# Altium PCB Gate_Driver_SMPS_V2.0_PCB3.PcbDoc
Units mm, origin at the board's own origin, x right, y up, seen from the top; angles counter-clockwise.
Board outline 47 x 30 mm, 2 copper layers (Top Layer, Bottom Layer); 42 components, 33 nets, 126 pads, 43 vias.
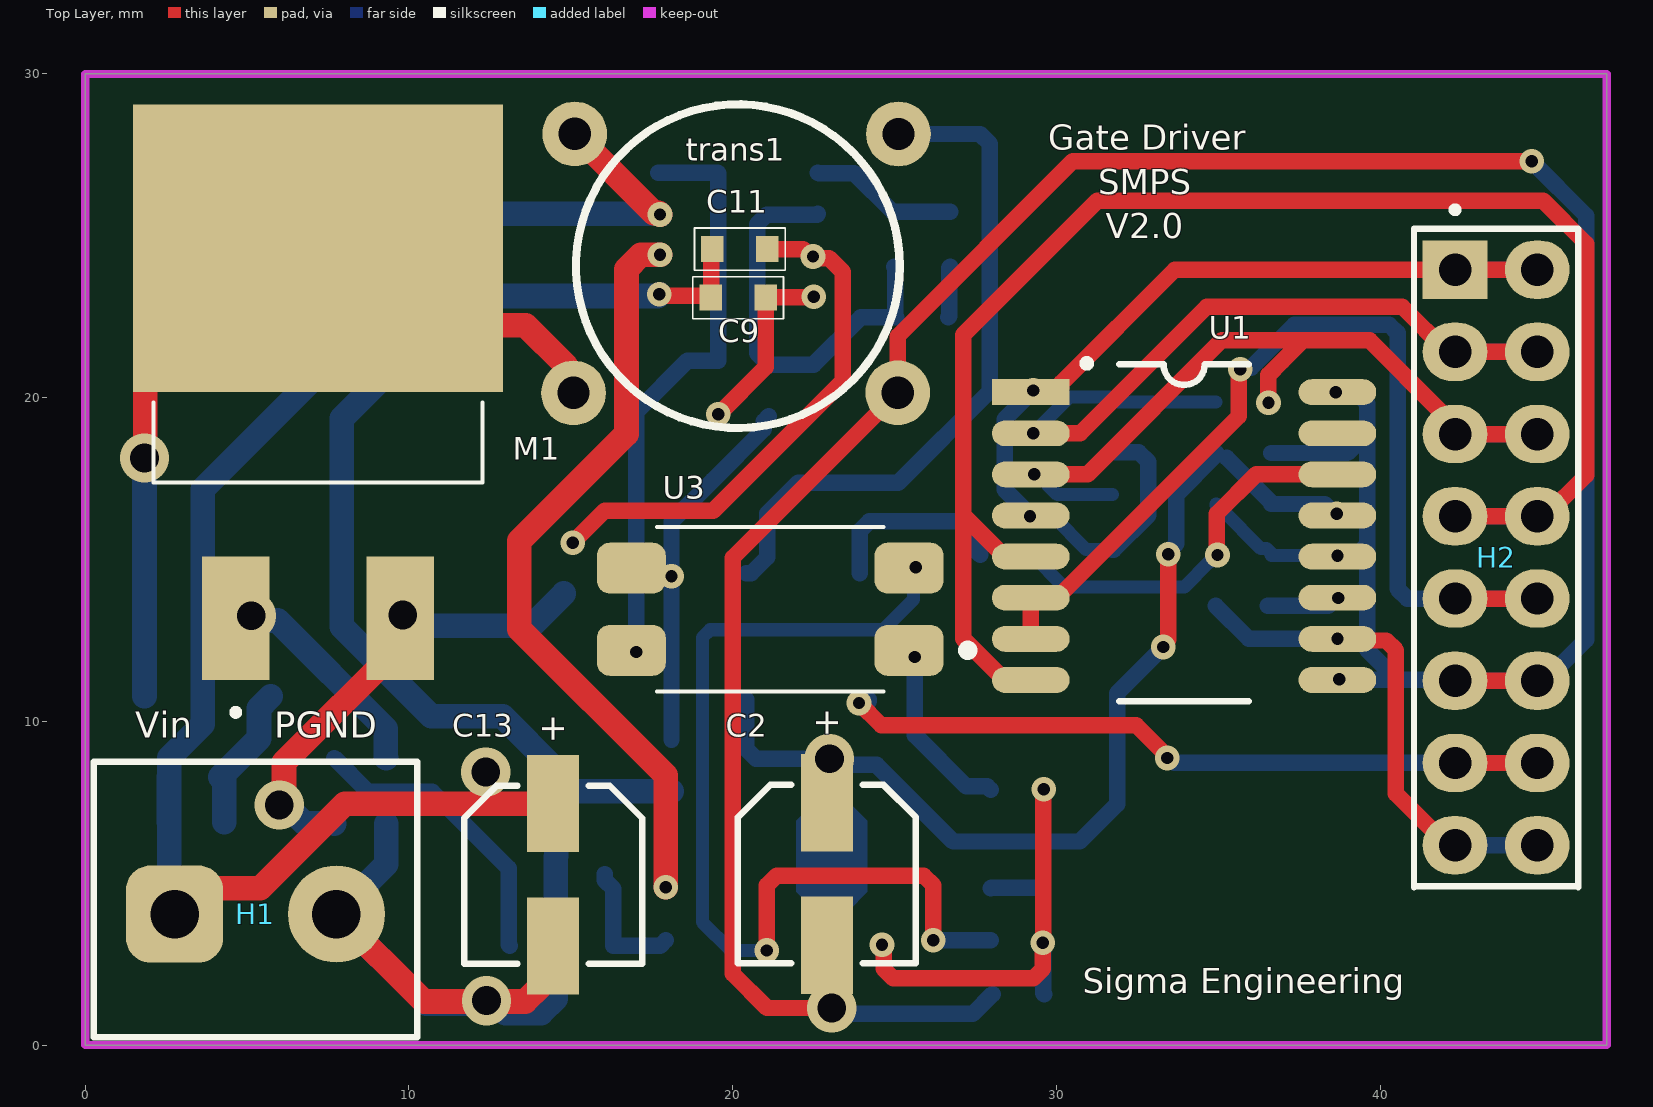
[diagram p0: Top Layer view]
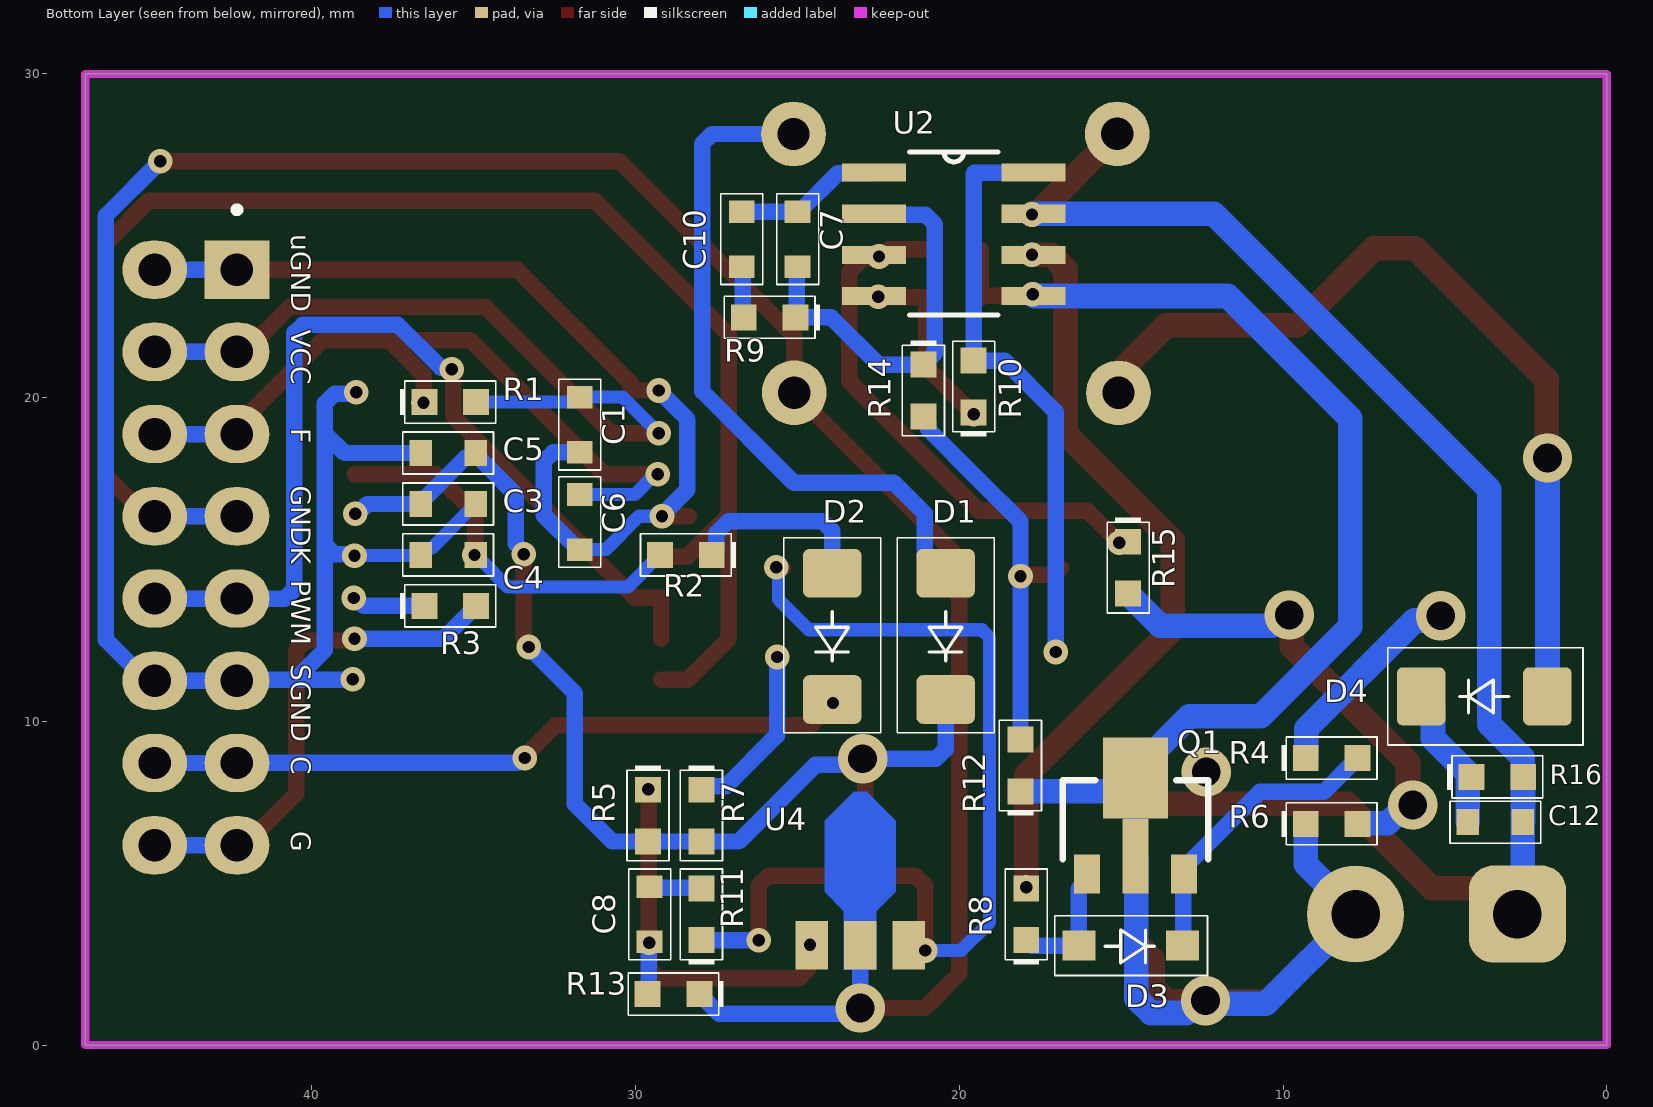
[diagram p1: Bottom Layer view, seen from below]
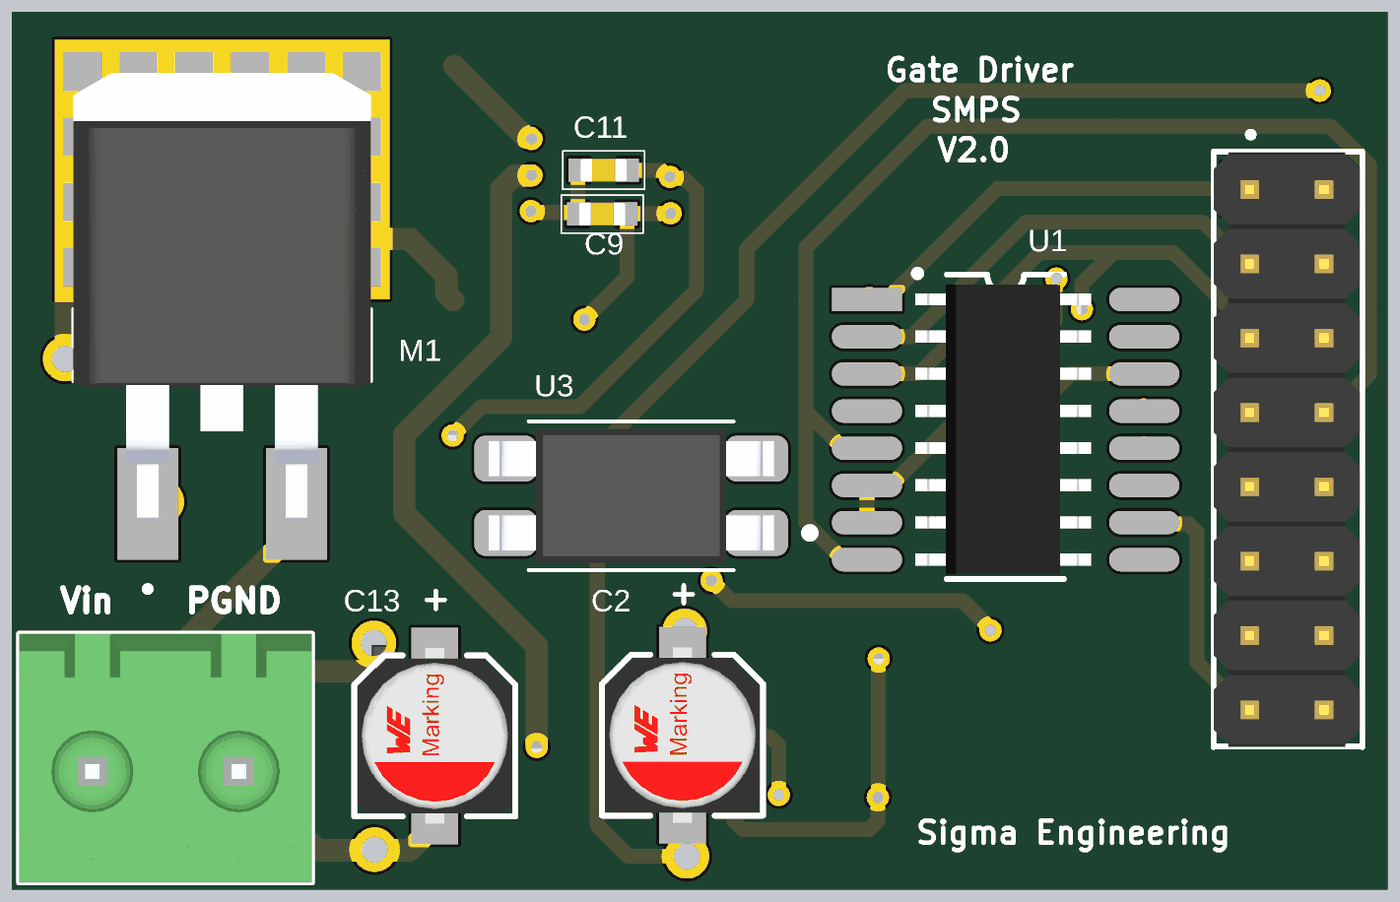
[diagram p2: 3D render of the assembled board from above, using the file's embedded part models]
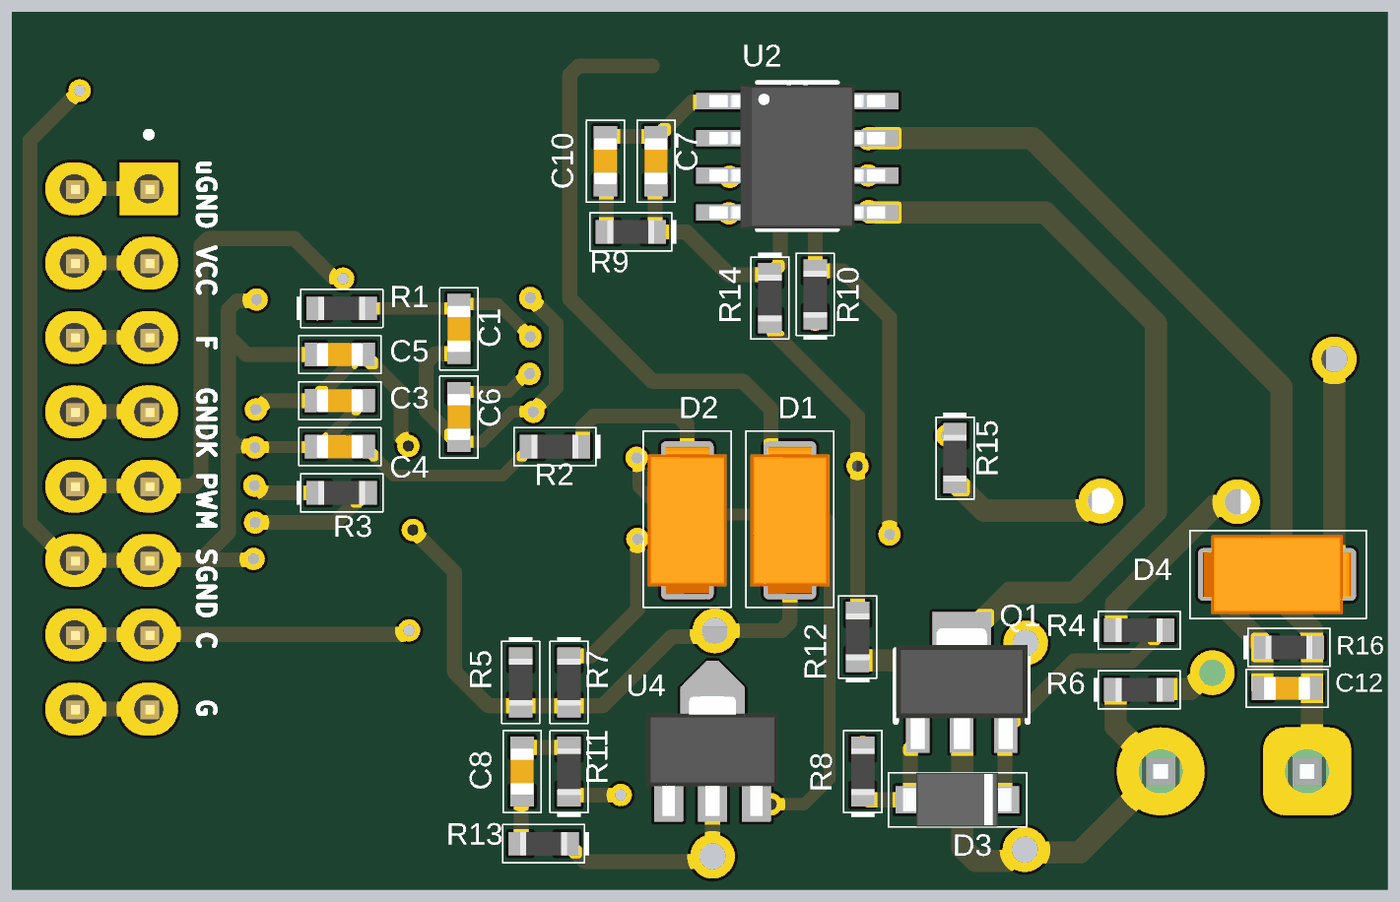
[diagram p3: 3D render of the assembled board from below, using the file's embedded part models]

## Layer stack, top to bottom
Top Solder: solder mask 0.0102, Solder Resist, Dk 3.5
Top Layer: signal copper 0.0356
Dielectric 1: dielectric 0.32, FR-4, Dk 4.8
Bottom Layer: signal copper 0.0356
Bottom Solder: solder mask 0.0102, Solder Resist, Dk 3.5

## Board outline
0,0 47,0 47,30 0,30

## Design rules (kind name [scope] priority, off if disabled: settings)
Clearance Clearance_4 [InNamedPolygon('SGND_L01_P002')] p1: gap=0.254 ignorepadtopadclearanceinfootprint=FALSE except(0: Arc-Hole Track-Hole SMDPad-Hole THPad-Hole Via-Hole Fill-Hole Poly-Hole Region-Hole Text-Hole; 0.508: Track-Poly SMDPad-Poly Via-Poly)
Clearance Clearance_3 [InNamedPolygon('PGND_L01_P001')] p2: gap=0.254 ignorepadtopadclearanceinfootprint=FALSE except(0: Arc-Hole Track-Hole SMDPad-Hole THPad-Hole Via-Hole Fill-Hole Poly-Hole Region-Hole Text-Hole; 0.508: Arc-Track Track-Track Track-Poly SMDPad-THPad SMDPad-Poly)
Clearance Clearance_2 [InNamedPolygon('PGND_L01_P001')] p3: gap=0.254 ignorepadtopadclearanceinfootprint=FALSE except(0: Arc-Hole Track-Hole SMDPad-Hole THPad-Hole Via-Hole Fill-Hole Poly-Hole Region-Hole Text-Hole; 0.381: Arc-Arc Arc-Track Track-Track; 0.508: Arc-SMDPad Track-SMDPad)
Clearance Clearance_1 [InNamedPolygon('SGND_L01_P009')] p4: gap=0.254 ignorepadtopadclearanceinfootprint=FALSE except(0: Arc-Hole Track-Hole SMDPad-Hole THPad-Hole Via-Hole Fill-Hole Poly-Hole Region-Hole Text-Hole; 0.3: Arc-Arc Arc-Track Arc-SMDPad Track-Track Track-SMDPad)
Clearance [All] p5: gap=0.254 ignorepadtopadclearanceinfootprint=FALSE except(0: Arc-Hole Track-Hole SMDPad-Hole THPad-Hole Via-Hole Fill-Hole Poly-Hole Region-Hole Text-Hole)
PolygonConnect [All] p1: connectstyle=Relief reliefconductorwidth=0.254 reliefentries=4 polygonreliefangle="90 Angle" airgapwidth=0.254
RoutingVias [All] p1: holewidth=0.381 width=0.762 viastyle="Through Hole" minholewidth=0.381 minwidth=0.762 maxholewidth=1.27 maxwidth=1.778
SilkToSilkClearance [All] p1: silktosilkclearance=0.025
SilkToSolderMaskClearance [IsPad] p1: minsilkscreentomaskgap=0.025 clearancetoexposedcopper=TRUE
SolderMaskExpansion [All] p1: expansion=0.102 istentingtop=FALSE
Width [All] p1: maxlimit=0.762 minlimit=0.406 preferedwidth=0.508
28 further rules are at their usual default settings.

## Components (designator, comment, footprint, x,y, rotation, side; value= is the part's Value field where it differs from the comment)
C1 "0.1u" 0603_CAP 31.725,19.163 r270 bottom
C2 "470u-50v" WCAP-ASLI_D5H5.5 22.911,5.283 r90 top
C3 "100p" 0603_CAP 35.787,16.713 r180 bottom
C4 "0.1u" 0603_CAP 35.787,15.138 r0 bottom
C5 "0.1u" 0603_CAP 35.787,18.288 r0 bottom
C6 "1n" 0603_CAP 31.725,16.154 r270 bottom
C7 "10nAC" 0603_CAP 24.994,24.892 r90 bottom
C8 "10n" 0603_CAP 29.566,4.039 r270 bottom
C9 "13.6n" 0603_CAP 20.168,23.089 r0 top
C10 "10nAC" 0603_CAP 26.721,24.892 r90 bottom
C11 "100pf" 0603_CAP 20.218,24.587 r0 top
C12 "3.3n" 0603_CAP 3.443,6.883 r180 bottom
C13 "470u-50v" WCAP-ASLI_D5H5.5 14.453,5.258 r90 top
D1 "Diode" US1K_SMD 20.422,12.624 r90 bottom
D2 "Diode" US1K_SMD 23.927,12.624 r90 bottom
D3 "1N5817" 1N5817W 14.707,3.073 r0 bottom
D4 "Diode" US1K_SMD 3.785,10.77 r180 bottom
H1 "PS-IN" PLUG 5.258,4.496 r0 top
H2 "H2*8" HDR2X8 42.316,23.952 r270 top
M1 "IRF540N" IRF540N_SMD 7.188,20.168 r90 top
Q1 "B772-PNP" B772_SMD 14.554,6.883 r180 bottom
R1 "4.7K" 0603_RES 35.725,19.863 r180 bottom
R2 "100" 0603_RES 28.448,15.138 r0 bottom
R3 "8.2" 0603_RES 35.725,13.564 r180 bottom
R4 "20" 0603_RES 8.496,8.865 r180 bottom
R5 "13.5K" 0603_RES 29.616,7.087 r270 bottom
R6 "0.25/4W" 0603_RES 8.496,6.833 r180 bottom
R7 "1K" 0603_RES 27.965,7.087 r270 bottom
R8 "47" 0603_RES 17.932,4.039 r90 bottom
R9 "11.2K" 0603_RES 25.857,22.479 r0 bottom
R10 "600-POTENTIO" 0603_RES 19.558,20.343 r90 bottom
R11 "16K" 0603_RES 27.965,4.039 r90 bottom
R12 "1K" 0603_RES 18.11,8.636 r90 bottom
R13 "2.5K" 0603_RES 28.829,1.575 r0 bottom
R14 "5.6K" 0603_RES 21.107,20.218 r270 bottom
R15 "42K" 0603_RES 14.783,14.746 r270 bottom
R16 "510" 0603_RES 3.378,8.28 r180 bottom
trans1 "core-name" TRANSFORMER_2 11.871,-66.104 r0 top
U1 "FOD8332" "SO16 - W" 29.21,20.168 r0 top
U2 "UC3843BN" UC3843_SMD 20.168,25.044 r180 bottom
U3 "PC817" PC816_SMD 21.158,13.462 r180 top
U4 "TL431" VREG_TL431IPK 23.063,5.08 r180 bottom

## Footprints (in the part's own frame and the unit in brackets; to place one, negate y for a bottom-side part, rotate by r counter-clockwise, add the part's x,y. Pads: shape width x height; smd on the part's side, far side on the other; paste and mask are expansions set on the pad)
1N5817W [mm]
  rect 1.02x0.94 smd: A(1.6,0) C(-1.6,0)
  silkscreen extent -2.37,-0.92 2.35,0.92, body extent -1.85,-0.92 1.85,0.92, height 1.35
0603_CAP [mm] "Soft Termination MLCC, body 1.60x0.80mm"
  rect 0.7x0.8 smd: 1(-0.85,0) 2(0.85,0)
  silkscreen extent -1.4,-0.65 1.4,0.65, body extent -0.8,-0.4 0.8,0.4, height 0.8
0603_RES [mm] "SMD Mono-color Chip LED, body 1.6x0.8mm"
  rect 0.8x0.8 smd: 1(-0.8,0) 2(0.8,0)
  silkscreen extent -1.55,-0.65 1.4,0.65, body extent -0.8,-0.4 0.8,0.4, height 0.35
B772_SMD [mm]
  rect 0.8x1.2 smd: B(-1.5,-1.6) E(1.5,-1.6)
  rect 0.8x2.3 smd paste-2 mask+0: C(0,-1.05)
  rect 2x2.5 smd: C(0,1.36)
  silkscreen extent -2.25,-1.15 2.25,1.3, body extent -2.25,-2.07 2.25,2.05, height 1.6
HDR2X8 [mm] "Connector; Header; 4x2 Position"
  oval 1.8x2 hole 1: 1(0,2.54) 2(2.54,2.54) 2(2.54,0) 3(5.08,2.54) 3(5.08,0) 4(7.62,0) 4(7.62,2.54) 5(10.16,0) 5(10.16,2.54) 6(12.7,0) 6(12.7,2.54) 7(15.24,0) 7(15.24,2.54) 8(17.78,0) 8(17.78,2.54)
  rect 1.8x2 hole 1: 1(0,0)
  silkscreen extent -1.95,-1.27 19.08,3.81, body extent -1.24,-1.27 19.08,3.73, height 8.6
IRF540N_SMD [mm]
  rect 8.89x11.43 smd paste-7: D(4.445,0)
  rect 3.81x2.08 smd: G(-6.985,2.54) S(-6.985,-2.54)
  silkscreen extent -9.99,-5.08 -0.32,5.08, body extent -7.49,-5.08 7.75,5.08, height 4.83
PC816_SMD [mm]
  rrect50% 2.13x1.57 smd: 1(-4.29,1.27) 2(-4.29,-1.27) 3(4.29,-1.27) 4(4.29,1.27)
  silkscreen extent -6.25,-2.54 3.5,2.54, body extent -4.87,-2.29 4.87,2.29, height 4
PLUG [mm] "5.00mm - Open Vertical PCB Header - 02p"
  rrect50% 3x3 hole 1.5: 1(-2.5,-0.45)
  round 3 hole 1.5: 2(2.5,-0.45)
  silkscreen extent -5,-4.25 5,4.25, body extent -5,-4.25 5,4.25, height 12.1
"SO16 - W" [mm]
  rect 2.4x0.8 smd: 1(0,0)
  oval 2.4x0.8 smd: 2(0,-1.27) 3(0,-2.54) 4(0,-3.81) 5(0,-5.08) 6(0,-6.35) 7(0,-7.62) 8(0,-8.89) 9(9.47,-8.89) 10(9.47,-7.62) 11(9.47,-6.35) 12(9.47,-5.08) 13(9.47,-3.81) 14(9.47,-2.54) 15(9.47,-1.27) 16(9.47,0)
  silkscreen extent 1.63,-9.55 6.73,0.99, body extent 1.65,-9.39 7.65,0.51, height 1.4
TRANSFORMER_2 [mm]
  round 2 hole 1: 1(3.212,86.25) 2(3.25,94.25) 3(13.226,86.255) 4(13.249,94.247)
  silkscreen extent 3.29,85.16 13.29,95.16, body extent 3.23,85.26 13.23,95.26, height 7
UC3843_SMD [mil]
  rect 78x22 smd: 1(-97,75) 2(-97,25) 3(-97,-25) 4(-97,-75) 5(97,-75) 6(97,-25) 7(97,25) 8(97,75)
  silkscreen extent -54,-98 54,100, body extent -118,-96 118,96, height 69
US1K_SMD [mm]
  rrect25% 1.5x1.8 smd: A(1.95,0) K(-1.95,0)
  silkscreen extent -2.97,-1.5 3.05,1.5, body extent -2.53,-1.35 2.52,1.35, height 2.17
VREG_TL431IPK [mm]
  rect 1x1.5 smd paste-2 mask+0: A(0,-2)
  rect 1x1.5 smd: C(1.5,-2) R(-1.5,-2)
  Top Layer region: 1.1,1.85 1.1,-0.35 0.5,-0.95 0.5,-2.75 -0.5,-2.75 -0.5,-0.95 -1.1,-0.35 -1.1,1.85 -0.2,2.75 0.2,2.75
  body extent -2.25,-2.56 2.25,1.54, height 1.6
WCAP-ASLI_D5H5.5 [mm] "Aluminium Electrolytic V-Chip SMT Capacitors, 5x5.5mm"
  rect 3x1.6 smd: 1(2.2,0) 2(-2.2,0)
  silkscreen extent -2.75,-2.75 2.75,2.75, body extent -3,-2.65 3,2.65, height 5.5

## Part data
C1 C2 C3 C4 C5 C6 C13: library part CAP-DC
C7 C8 C9 C10 C11 C12: library part CAP-AC
D3: "Lite-On 1N5817, Schottky Diode, 20V 3A, 2-Pin DO-201AD", Average Rectified Current=3A, Case/Package=DO-201AD, Forward Voltage=850mV, Manufacturer=Vishay, Manufacturer Part Number=1N5820, Max Forward Surge Current (Ifsm)=80A, Max Operating Temperature=125°C, Max Repetitive Reverse Voltage (Vrrm)=20V, Max Reverse Current=150uA, Max Reverse Leakage Current=2mA, Min Operating Temperature=-65°C, Supplier Part Number 1=700-9899, ComponentLink1Description=http://www.liteon-semi.com/download.php?hSFile=1N5820-1N5822-5.pdf&hDFile=tecfile01312524214.pdf&src-supplier=Avnet+Asia, ComponentLink1URL=http://www.liteon-semi.com/download.php?hSFile=1N5820-1N5822-5.pdf&hDFile=tecfile01312524214.pdf&src-supplier=Avnet+Asia, ComponentLink2Description=http://docs-usa.electrocomponents.com/techlib:/itc_doclist_US.htm?stockno=7009899&src-supplier=Allied+Electronics, ComponentLink2URL=http://docs-usa.electrocomponents.com/techlib:/itc_doclist_US.htm?stockno=7009899&src-supplier=Allied+Electronics, Element Configuration=Single, Forward Current=3A, Height=5.3mm, Length=9.5mm, Max Surge Current=80A, Mount="Through Hole", Number of Pins=2, Packaging=Bulk, Peak Non-Repetitive Surge Current=80A, Radiation Hardening=No, RoHS Compliant=No, Stock 1=0, Supplier 1=RSComponents, Width=5.3mm
H1: library part PS-plug
H2: library part "Header 8X2"
M1: "Mosfet, Power; N-ch; Vdss 100V; Rds(on) 44MILLIOHMS; Id 33A; TO-220AB; Pd 130W; -55DEG", Case/Package=TO-220AB, Continuous Drain Current (ID)=33A, Gate to Source Voltage (Vgs)=20V, Manufacturer="International Rectifier", Max Operating Temperature=175°C, Min Operating Temperature=-55°C, Power Dissipation=130W, Supplier Part Number 1=IRF540NPBF-TUBE, ComponentLink1Description=http://www.produktinfo.conrad.com/datenblaetter/150000-174999/162412-da-01-en-IRF_540_N.pdf?src-supplier=Conrad, ComponentLink1URL=http://www.produktinfo.conrad.com/datenblaetter/150000-174999/162412-da-01-en-IRF_540_N.pdf?src-supplier=Conrad, Manufacturer Part Number=IRF540N, Mount="Through Hole", Number of Elements=1, Number of Pins=3, RoHS Compliant=No, Stock 1=0, Supplier 1="Future Electronics"
R1 R2 R3 R4 R5 R6 R7 R8 R9 R10 R11 R12 R13 R14 R15 R16: library part RES
trans1: library part "flyback trans"
U1: library part TLP5214A
U2: "IC REG CTRLR BST/FLYBK 8-MINIDIP", Case/Package=PDIP, Frequency=250kHz, Manufacturer=STMicroelectronics, Max Frequency=500kHz, Max Operating Temperature=150°C, Max Power Dissipation=800mW, Max Supply Current=17mA, Max Supply Voltage=30V, Min Operating Temperature=-40°C, Min Supply Voltage=12V, Output Current=1A, Output Voltage=5.1V, Package Quantity=50, ComponentLink1Description=http://www.st.com/content/ccc/resource/technical/document/datasheet/b6/e8/cc/ba/4f/cd/42/9b/CD00000966.pdf/files/CD00000966.pdf/jcr:content/translations/en.CD00000966.pdf?src-supplier=Digi-Key, ComponentLink1URL=http://www.st.com/content/ccc/resource/technical/document/datasheet/b6/e8/cc/ba/4f/cd/42/9b/CD00000966.pdf/files/CD00000966.pdf/jcr:content/translations/en.CD00000966.pdf?src-supplier=Digi-Key, ComponentLink2Description=http://www.mouser.com/ds/2/389/uc2842b-974450.pdf?src-supplier=Mouser, ComponentLink2URL=http://www.mouser.com/ds/2/389/uc2842b-974450.pdf?src-supplier=Mouser, ComponentLink3Description=http://www.st.com/web/en/resource/technical/document/datasheet/CD00000966.pdf?src-supplier=Avnet, ComponentLink3URL=http://www.st.com/web/en/resource/technical/document/datasheet/CD00000966.pdf?src-supplier=Avnet, ComponentLink4Description=http://www.st.com/web/en/resource/technical/document/datasheet/CD00000966.pdf?src-supplier=Future+Electronics, ComponentLink4URL=http://www.st.com/web/en/resource/technical/document/datasheet/CD00000966.pdf?src-supplier=Future+Electronics, ComponentLink5Description=https://www.verical.com/server-webapp/html/getDatasheet?partID=66041&src-supplier=Verical, ComponentLink5URL=https://www.verical.com/server-webapp/html/getDatasheet?partID=66041&src-supplier=Verical, ComponentLink6Description=http://www.produktinfo.conrad.com/datenblaetter/1100000-1199999/001185662-da-01-en-IC_REG_CTRLR_PWM_CM_UC3843BN_DIP_8_STM.pdf?src-supplier=Conrad, ComponentLink6URL=http://www.produktinfo.conrad.com/datenblaetter/1100000-1199999/001185662-da-01-en-IC_REG_CTRLR_PWM_CM_UC3843BN_DIP_8_STM.pdf?src-supplier=Conrad, Duty Cycle=100%, Fall Time=50ns, Height=3.32mm, Lead Free="Lead Free", Length=10.92mm, Manufacturer Part Number=UC3843BN, Max Duty Cycle=100%, Mount="Through Hole", Number of Outputs=1, Number of Pins=8, Packaging=Rail/Tube, Power Dissipation=800mW, Pricing 1="1=0.9063, 10=0.7523, 25=0.7389, 100=0.6172, 250=0.5737, 500=0.4903, 1000=0.3493, 4000=0.3129, 5000=0.3123, 6000=0.3104, 8000=0.3085, 10000=0.3066, 20000=0.3047, 25000=0.3027, 30000=0.3008, 50000=0.2988 (USD)", Radiation Hardening=No, REACH SVHC="No SVHC", Rise Time=50ns, RoHS Compliant=Yes, Series=-, Stock 1=669, Supplier 1="Arrow Electronics", Supplier Part Number 1=UC3843BN, Switching Frequency=500kHz, Topology=Boost,Flyback, Weight=0.032805oz, Width=6.6mm
U3: "Optocoupler DC-IN 1-CH Transistor DC-OUT 4-Pin PDIP Sleeve", Case/Package=PDIP, Collector Emitter Saturation Voltage=200mV, Collector Emitter Voltage (VCEO)=35V, Current Transfer Ratio=600%, Forward Current=50mA, Forward Voltage=1.4V, Manufacturer=Sharp, Max Operating Temperature=100°C, Min Operating Temperature=-30°C, Power Dissipation=200mW, Reverse Breakdown Voltage=6V, Fall Time=18000ns, Input Type=DC, Manufacturer Part Number=PC817, Mount="Through Hole", Number of Elements=1, Number of Pins=4, Packaging=Sleeve, Rise Time=18000ns, RoHS Compliant=No, Stock 1=0, Supplier 1="Arrow Electronics", Supplier Part Number 1=PC817
U4: library part TL431CZ, "V-Ref Adjustable 2.495V to 36V 100mA 3-Pin TO-92 Bulk", Case/Package=TO-92, Cathode Current=1mA, Manufacturer=STMicroelectronics, Max Input Voltage=37V, Max Operating Temperature=70°C, Max Output Current=100mA, Max Output Voltage=36V, Min Operating Temperature=0°C, Min Output Voltage=2.495V, Package Quantity=1, Temperature Coefficient=100ppm/°C, Tolerance=2.21%, Accuracy=2%, ComponentLink1Description=http://www.st.com/web/en/resource/technical/document/datasheet/CD00000986.pdf?src-supplier=Digi-Key, ComponentLink1URL=http://www.st.com/web/en/resource/technical/document/datasheet/CD00000986.pdf?src-supplier=Digi-Key, ComponentLink2Description=http://www.st.com/content/ccc/resource/technical/document/datasheet/2d/27/af/41/03/e2/44/8e/CD00000986.pdf/files/CD00000986.pdf/jcr:content/translations/en.CD00000986.pdf?src-supplier=Digi-Key, ComponentLink2URL=http://www.st.com/content/ccc/resource/technical/document/datasheet/2d/27/af/41/03/e2/44/8e/CD00000986.pdf/files/CD00000986.pdf/jcr:content/translations/en.CD00000986.pdf?src-supplier=Digi-Key, ComponentLink3Description=http://www.farnell.com/datasheets/1690313.pdf?src-supplier=Element14, ComponentLink3URL=http://www.farnell.com/datasheets/1690313.pdf?src-supplier=Element14, ComponentLink4Description=http://www.rapidonline.com/pdf/82-0290.pdf?src-supplier=Rapid+Electronics, ComponentLink4URL=http://www.rapidonline.com/pdf/82-0290.pdf?src-supplier=Rapid+Electronics, ComponentLink5Description=https://www.verical.com/server-webapp/html/getDatasheet?partID=98639&src-supplier=Verical, ComponentLink5URL=https://www.verical.com/server-webapp/html/getDatasheet?partID=98639&src-supplier=Verical, ComponentLink6Description=http://www.produktinfo.conrad.com/datenblaetter/150000-174999/155641-da-01-en-SPG_REF_TL431CZ_STM.pdf?src-supplier=Conrad, ComponentLink6URL=http://www.produktinfo.conrad.com/datenblaetter/150000-174999/155641-da-01-en-SPG_REF_TL431CZ_STM.pdf?src-supplier=Conrad, Height=4.4mm, Lead Free="Lead Free", Length=4.7mm, Manufacturer Part Number=TL431CZ, Mount="Through Hole", Nominal Supply Current=1mA, Number of Channels=1, Number of Pins=3, Output Current=100mA, Output Type=Adjustable, Output Voltage=36V, Packaging=Bulk, Pricing 1="1=0.4405, 10=0.3422, 100=0.2291, 500=0.1883, 1000=0.1722, 2500=0.1137, 10000=0.083, 1=0.3921, 10=0.3046, 100=0.2039, 500=0.1676, 1000=0.1299, 2500=0.1012, 10000=0.0723 (USD)", Radiation Hardening=No, REACH SVHC="No SVHC", Reference Type=Shunt,Adjustable, Reference Voltage=36V, RoHS Compliant=Yes, Series=-, Stock 1=5333, Supplier 1="Arrow Electronics", Supplier Part Number 1=TL431CZ, Supply Current=1mA, Weight=0.01lb, Width=3.7mm
D1 D2 D4: Datasheet=https://diotec.com/de/produktliste/D.html, ki_description=Diode, ki_keywords=Diode, Reference=D

## Via types
v1: diameter 0.762, hole 0.381, Top Layer to Bottom Layer, 35 vias
v2: diameter 1.524, hole 0.889, Top Layer to Bottom Layer, 8 vias

## Nets (pads, with @x,y where several pads share a name; then routed paths per layer and width w, separated by ;. In a path a pad name is that pad's centre, name@x,y a point inside that pad or via, vN(x,y) a via of type N, cw(c..) or ccw(c..) an arc to the next point about the centre after c; other vN are vias at no path point)
C: D2.K H2.7 | length 24.5
  Top Layer w0.508: v1(23.901,10.566) 24.587,9.881 32.467,9.881 33.426,8.921 v1(33.426,8.865) ; H2.7@42.316,8.712 H2.7@44.856,8.712
  Bottom Layer w0.508: v1(23.901,10.566) 23.901,10.648 D2.K ; D2.K@24.155,10.566 24.206,10.617 D2.K@24.206,10.674 ; v1(33.426,8.865) 33.495,8.865 33.635,8.725 42.304,8.725 42.316,8.712 H2.7@44.856,8.712
F: C6.1 H2.3 R1.1 U1.3 | length 26.2
  Top Layer w0.508: v1(29.312,17.628) 30.963,17.628 35.103,21.768 37.617,21.768 ; v1(36.551,19.837) 36.551,20.702 36.972,21.123 37.617,21.768 ; H2.3@44.856,18.872 42.316,18.872 41.884,19.305 41.884,19.559 39.674,21.768 37.617,21.768
  Bottom Layer w0.406: v1(29.312,17.628) 29.408,17.628 30.031,17.004 C6.1
  Bottom Layer w0.508: R1.1 v1(36.551,19.837) ; H2.3@42.316,18.872 H2.3@44.856,18.872
G: H2.8 R3.2 U1.10 | length 15.6
  Top Layer w0.508: v1(38.684,12.548) 38.735,12.497 40.19,12.497 40.488,12.199 40.488,7.763 42.078,6.172 H2.8@42.316,6.172
  Bottom Layer w0.508: R3.2 35.941,12.548 v1(38.684,12.548) ; H2.8@42.316,6.172 H2.8@44.856,6.172
GNDK: H2.4 U1.5 U1.8 | length 50.4
  Top Layer w0.508: U1.8 28.396,11.278 27.127,12.546 27.127,16.356 ; U1.5 28.396,15.088 27.127,16.356 ; H2.4@42.316,16.332 44.856,16.332 45.094,16.332 46.365,17.603 46.365,24.755 45.034,26.086 31.267,26.086 27.127,21.946 27.127,16.356
  Bottom Layer w0.508: H2.4@42.316,16.332 H2.4@44.856,16.332
Isns: M1.S R6.2 R15.2 | length 14.9
  Top Layer w0.762: v2(5.994,7.417) 6.14,7.563 6.14,8.73 9.728,12.318 9.728,13.208 v2(9.804,13.284)
  Bottom Layer w0.762: v2(5.994,7.417) 6.201,7.417 6.765,6.852 7.677,6.852 R6.2 ; v2(9.804,13.284) 10.011,13.284 10.341,12.954 13.791,12.954 R15.2
NetC4_1: C4.1 R2.2 U1.14 | length 12.1
  Top Layer w0.508: v1(34.976,15.138) 34.95,15.164 34.95,16.408 36.17,17.628 U1.14
  Bottom Layer w0.406: R2.2 30.239,14.148 33.947,14.148 34.741,14.942 34.791,14.942 34.937,15.088 C4.1
NetC7_1: C7.1 R9.1 R14.1 U2.2 | length 12.6
  Bottom Layer w0.508: U2.2 22.606,25.654 21.049,25.654 20.752,25.356 20.752,21.374 R14.1 22.499,21.018 23.959,22.479 R9.1 25.025,22.511 25.025,24.01 C7.1
NetC7_2: C7.2 C10.2 U2.1 | length 4.6
  Bottom Layer w0.508: U2.1 22.657,26.924 23.762,26.924 24.944,25.742 C7.2 C10.2
NetC8_1: C8.1 R11.2 | length 1.6
  Bottom Layer w0.508: R11.2 27.99,4.864 29.541,4.864 C8.1
NetC8_2: C8.2 R5.1 R13.2 U4.R | length 13.1
  Top Layer w0.508: v1(24.613,3.099) 24.661,3.05 24.661,2.355 24.959,2.057 29.284,2.057 29.582,2.355 29.582,3.173 29.597,3.188 29.597,7.884 v1(29.612,7.899)
  Bottom Layer w0.508: C8.2 29.582,3.173 29.598,3.157 29.598,1.606 R13.2 ; v1(29.582,3.158) C8.2@29.59,3.165
NetC9_2: C9.2 R10.1 U2.4 | length 5.7
  Top Layer w0.508: v1(19.558,19.482) 21.018,20.941 C9.2 21.03,23.101 22.492,23.101 v1(22.504,23.114)
NetC10_1: C10.1 R9.2 | length 1.6
  Bottom Layer w0.508: R9.2 26.689,22.511 26.689,24.01 C10.1
NetC11_2: C11.2 R15.1 U2.3 | length 16
  Top Layer w0.508: v1(15.062,15.519) 15.062,15.525 16.047,16.51 19.406,16.51 23.393,20.498 23.393,23.892 22.975,24.31 22.528,24.31 v1(22.479,24.359) ; C11.2 v1@22.182,24.587
NetC12_1: C12.1 D4.K R16.1 | length 4.6
  Bottom Layer w0.762: C12.1 4.293,8.166 R16.1 5.366,9.468 5.366,10.401 D4.K
NetD1_A: D1.A trans1.4 | length 21.2
  Bottom Layer w0.508: D1.A 20.572,14.574 21.068,15.07 21.068,16.419 22.022,17.374 25.121,17.374 27.94,20.193 27.94,27.846 27.642,28.143 trans1.4
NetD2_A: D2.A R2.1 | length 5.9
  Bottom Layer w0.508: D2.A 23.927,15.882 24.224,16.18 27.134,16.18 27.502,15.812 27.502,15.284 R2.1
NetD3_A: D3.A Q1.B R8.1 | length 4
  Bottom Layer w0.508: Q1.B 16.054,5.083 16.307,4.831 D3.A 17.767,3.073 R8.1
NetD3_C: D3.C Q1.E R4.2 | length 9.2
  Bottom Layer w0.508: R4.2 8.738,7.823 10.714,7.823 13.081,5.457 13.081,5.182 13.08,3.1 D3.C
NetD4_A: D4.A M1.D trans1.1 | length 26.9
  Top Layer w0.762: v2(1.829,18.136) 1.854,18.161 1.854,20.549 5.918,24.613 M1.D 9.561,22.24 13.6,22.24 14.846,20.993 14.846,20.383 trans1.1
  Bottom Layer w0.762: v2(1.829,18.136) 1.832,18.133 1.832,10.772 D4.A
NetM1_G: M1.G R4.1 | length 6.5
  Bottom Layer w0.762: v2(5.131,13.259) 5.277,13.113 5.937,13.113 9.277,9.773 9.277,8.884 R4.1
NetR3_1: R3.1 U1.11 | length 2.3
  Bottom Layer w0.508: R3.1 38.394,13.564 38.641,13.81 v1(38.71,13.81)
NetR7_1: R7.1 U3.1 | length 5.4
  Bottom Layer w0.508: v1(25.629,11.989) 25.629,9.576 27.211,7.994 27.858,7.994 R7.1
NetR11_1: R11.1 U3.2 U4.C | length 30.3
  Top Layer w0.508: v1(21.057,2.921) 21.057,4.935 21.354,5.232 25.902,5.232 26.2,4.935 v1(26.2,3.239) ; U3.2 U3.2@25.728,14.732
  Bottom Layer w0.406: v1(21.057,2.921) 19.939,2.921 19.064,3.796 19.064,12.589 19.302,12.827 24.646,12.827 25.586,13.767 25.586,14.689 v1(25.654,14.757)
  Bottom Layer w0.508: v1(26.2,3.239) R11.1
PGND: C9.1 C11.1 C13.2 H1.2 Q1.C R6.1 R12.1 U2.5 | length 61
  Top Layer w0.508: v1(17.734,23.19) 17.783,23.141 19.265,23.141 C9.1 19.343,23.114 19.343,24.562 C11.1
  Top Layer w0.762: H1.2 10.457,1.346 13.587,1.346 14.034,1.793 14.034,2.639 C13.2
  Bottom Layer w0.762: R6.1 9.296,5.584 H1.2 10.534,1.27 12.294,1.27 v2(12.395,1.372) 12.601,1.372 12.982,0.991 14.089,0.991 14.535,1.437 14.535,5.814 14.554,5.833 Q1.C@14.554,8.244 ; v1(17.734,23.19) 17.684,23.139 11.709,23.139 7.925,19.355 7.925,12.929 10.693,10.16 12.888,10.16 14.554,8.494 Q1.C@14.554,8.244 ; R12.1 14.962,7.836 Q1.C@14.554,8.244
PMW: H2.5 U1.6 U1.7 | length 31.9
  Top Layer w0.508: U1.7 U1.6 30.024,13.818 35.631,19.424 35.631,20.831 v1(35.68,20.879) ; H2.5@42.316,13.792 H2.5@44.856,13.792
  Bottom Layer w0.508: v1(35.68,20.879) 35.728,20.928 36.022,20.928 37.344,22.25 40.284,22.25 40.538,21.996 40.538,14.09 40.836,13.792 42.316,13.792 H2.5@44.856,13.792
pwm: R8.2 U2.6 | length 23.6
  Top Layer w0.762: v1(17.755,24.409) 17.165,24.409 16.718,23.963 16.718,18.877 13.411,15.57 13.411,12.852 17.932,8.331 v1(17.932,4.877)
  Bottom Layer w0.508: U2.6 v1(17.755,24.409) ; R8.2 v1(17.932,4.877)
SGND: C2.2 C3.2 C4.2 C5.2 H2.6 R13.1 trans1.3 U1.9 U1.12 U1.16 U4.A | length 99.6
  Top Layer w0.508: C2.2@23.053,2.101 C2.2@23.063,2.09 ; v2@23.063,0.965 22.885,1.143 21.06,1.143 20,2.203 20,15.054 trans1.3 25.097,21.897 30.505,27.305 v1(44.679,27.305) ; U1.9 U1.9@38.693,11.265 ; H2.6@42.304,11.265 42.316,11.252 H2.6@44.856,11.252
  Bottom Layer w0.406: C3.2 34.937,16.663 35.084,16.516 35.134,16.516 36.315,15.335 36.491,15.335 36.637,15.188 C4.2 36.65,15.126 38.672,15.126 v1(38.684,15.113)
  Bottom Layer w0.508: U4.A 23.063,0.965 27.419,0.965 R13.1 ; C5.2 38.989,18.288 39.599,18.898 ; v1(38.633,20.168) 38.682,20.119 39.299,20.119 39.599,19.819 39.599,18.898 ; v1(38.684,15.113) 38.733,15.162 39.301,15.162 39.599,15.459 ; v1(38.735,11.303) 38.76,11.278 40.526,11.278 ; v1(44.679,27.305) 46.365,25.619 46.365,12.523 45.094,11.252 44.856,11.252 42.316,11.252 42.291,11.278 40.526,11.278 ; 39.599,15.459 39.599,12.205 40.526,11.278 ; 39.599,15.459 39.599,18.898
  other v2: 23.063,1.143
uGND: C1.2 C6.2 H2.1 U1.1 U1.4 | length 32.6
  Top Layer w0.508: U1.4@28.356,16.332 v1(29.185,16.332) ; v1(29.286,20.218) 30.061,20.218 30.156,20.314 30.156,20.453 33.655,23.952 42.316,23.952 H2.1@44.856,23.952
  Bottom Layer w0.406: v1(29.185,16.332) 29.896,16.332 30.924,15.304 C6.2
  Bottom Layer w0.508: v1(29.185,16.332) 29.185,16.374 28.397,17.161 28.397,19.329 v1(29.286,20.218) ; C6.2 31.775,15.304 32.842,16.372 32.842,18.016 32.545,18.313 C1.2 ; H2.1@42.316,23.952 H2.1@44.856,23.952
VCC: C1.1 H2.2 R1.2 U1.2 | length 26.5
  Top Layer w0.508: v1(29.286,18.898) 30.734,18.898 34.646,22.809 40.681,22.809 42.078,21.412 42.316,21.412 H2.2@44.856,21.412
  Bottom Layer w0.406: v1(29.286,18.898) 30.402,20.013 C1.1 31.775,20.013 31.925,19.863 R1.2
  Bottom Layer w0.508: H2.2@42.316,21.412 H2.2@44.856,21.412
Vfb: R12.2 R14.2 U3.3 | length 12.6
  Top Layer w0.508: U3.3 17.074,14.527 18.062,14.527 v1(18.11,14.478)
  Bottom Layer w0.508: R12.2 v1(18.11,14.478) 18.11,16.172 19.388,17.45 20.961,19.024 20.961,19.272 R14.2
Vin: C12.2 C13.1 H1.1 R16.2 trans1.2 U2.7 | length 48
  Top Layer w0.762: H1.1 3.56,4.848 5.401,4.848 8.011,7.458 C13.1 ; trans1.2 17.565,25.703 17.706,25.703 v1(17.755,25.654)
  Bottom Layer w0.762: C12.2@2.593,6.833 2.593,4.211 H1.1 ; C12.2 2.585,6.891 2.585,8.273 R16.2 2.597,8.299 2.597,8.871 3.632,9.906 3.632,17.17 12.141,25.679 U2.7 17.729,25.679 v1(17.755,25.654)
  other v2: 12.37,8.433
Voiso: C2.1 C3.1 C5.1 D1.K R5.2 R7.2 U1.13 | length 32.4
  Top Layer w0.508: C2.1 22.911,8.77 v2(22.987,8.846) ; v1(33.299,12.294) 33.299,12.362 33.452,12.515 v1(33.452,15.164)
  Bottom Layer w0.508: D1.K 20.422,9.144 20.719,8.846 v2(22.987,8.846) ; v2@22.844,8.652 24.445,8.652 26.81,6.287 R7.2 R5.2 30.721,6.287 31.877,7.442 31.877,10.871 v1(33.299,12.294) ; v1(33.452,15.164) 33.452,15.233 33.706,15.487 33.706,17.006 34.937,18.238 C5.1 ; C5.1@35.259,18.142 36.637,16.763 C3.1 38.285,16.713 38.59,16.408 v1(38.659,16.408)
Vref: R10.2 U2.8 U3.4 | length 18.3
  Bottom Layer w0.508: v1(17.018,12.141) 17.018,19.558 18.603,21.143 R10.2 19.558,26.924 19.533,26.949 U2.8
pads on no net: U1.15

## Keep-outs
Keep-Out Layer:
  the board outline again, w0.254

## Silkscreen, mask and mechanical layers (free items; w line width, h text height)
Top Overlay:
  text "Gate Driver" at 29.741,27.653 h0.76
  text "SMPS" at 31.295,26.285 h0.76
  text "V2.0" at 31.526,24.917 h0.76
  text "Vin" at 1.546,9.496 h0.8
  text "PGND" at 5.839,9.496 h0.8
  text "Sigma Engineering" at 30.808,1.598 h0.76
Bottom Overlay:
  text "uGND" at 40.642,25.047 h0.6 r90
  text "VCC" at 40.642,22.1 h0.6 r90
  text "F" at 40.642,19.052 h0.6 r90
  text "GNDK" at 40.642,17.274 h0.6 r90
  text "PWM" at 40.642,14.365 h0.6 r90
  text "SGND" at 40.642,11.763 h0.6 r90
  text "C" at 40.642,8.918 h0.6 r90
  text "G" at 40.642,6.606 h0.6 r90

## Text inside footprints (layer, text, board x,y; h text height)
C2: Top Overlay "+" at 23.266,9.5 h0.8 r90
C13: Top Overlay "+" at 14.803,9.308 h0.8 r90